# Altium PCB xds100v2.PcbDoc
Units mm, origin at the board's own origin, x right, y up, seen from the top; angles counter-clockwise.
Board outline 36 x 21 mm, 2 copper layers (Top Layer, Bottom Layer), stack 1.571 mm thick; 31 components, 31 nets, 172 pads, 0 vias.
Unrouted connection lines stored in the file: 88.
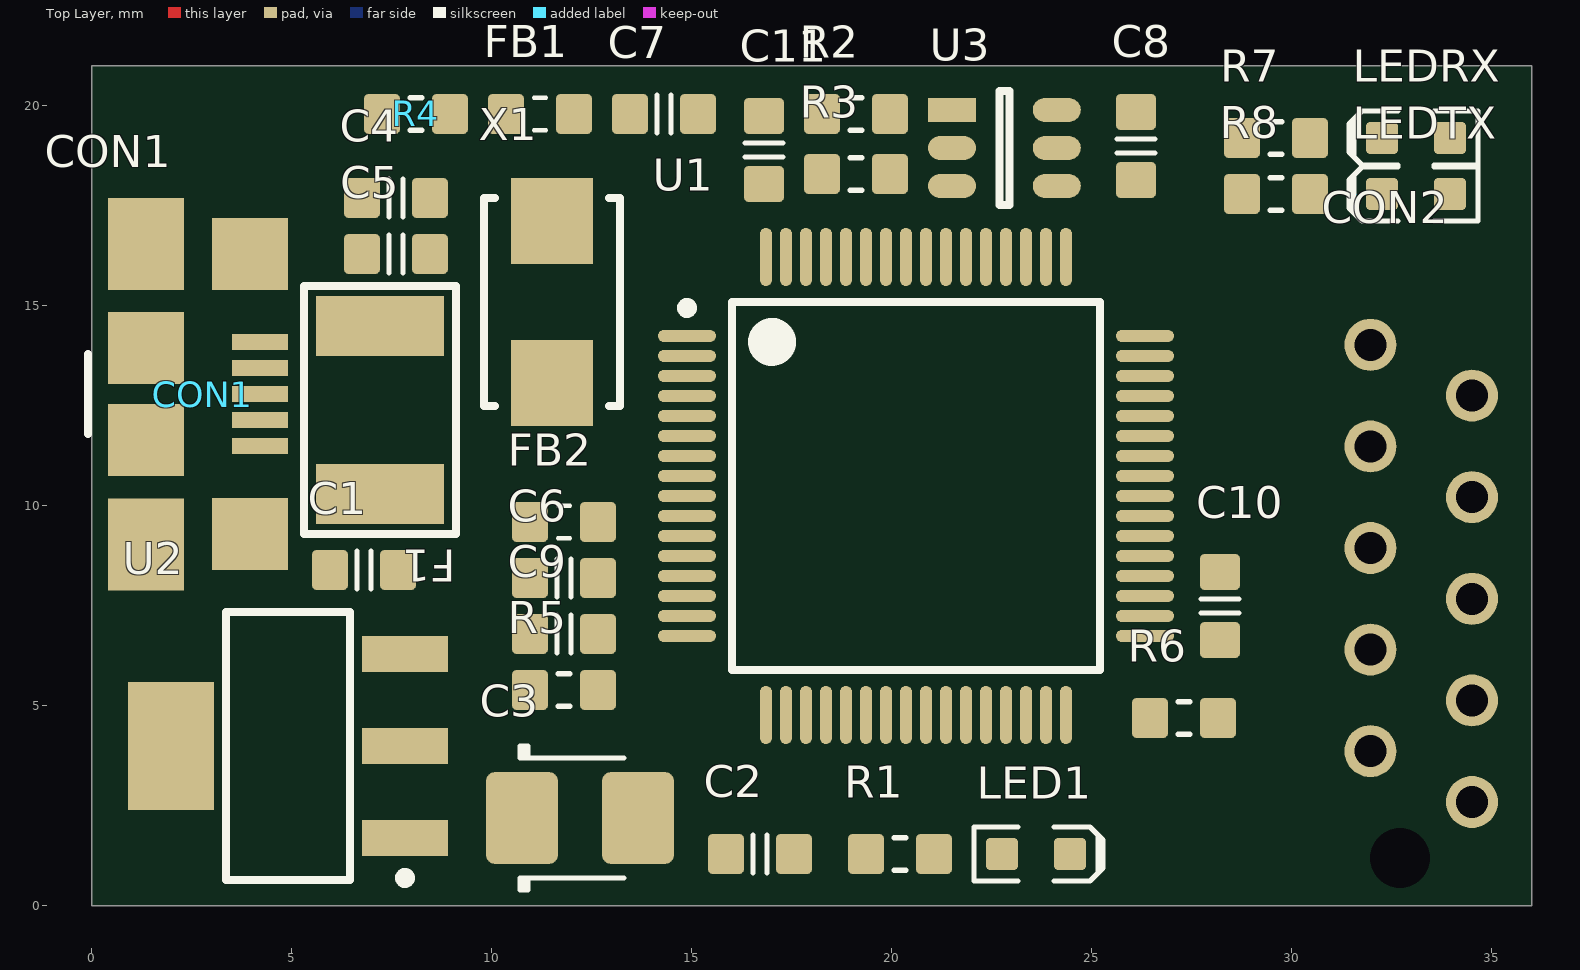
[diagram p0: Top Layer view]
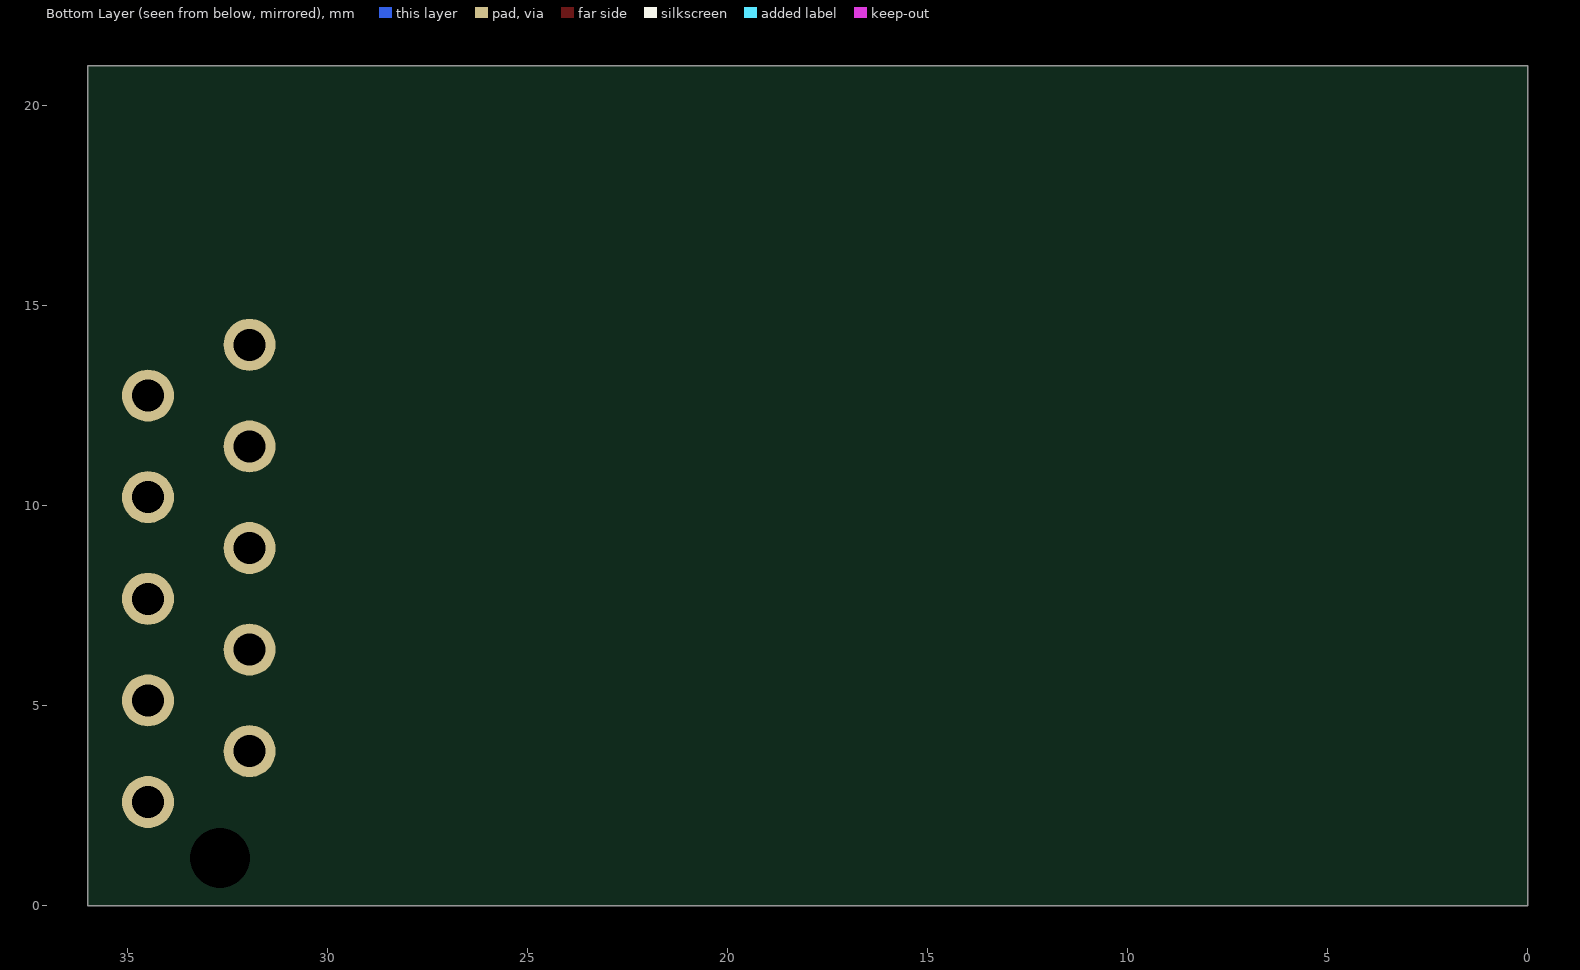
[diagram p1: Bottom Layer view, seen from below]

## Layer stack, top to bottom
Top Solder: solder mask 0.0102, Solder Resist, Dk 3.5
Top Layer: signal copper 0.0356
Dielectric 1: dielectric 1.5, FR-4, Dk 4.8
Bottom Layer: signal copper 0.0356
Bottom Solder: solder mask 0.0102, Solder Resist, Dk 3.5

## Board outline
0,0 36,0 36,21 0,21

## Design rules (kind name [scope] priority, off if disabled: settings)
Clearance [All] p1: gap=0.2
ComponentClearance [All] p1: gap=0.2 collisioncheckmode=3 verticalgap=0.2 showdistances=FALSE
PlaneClearance [All] p1: clearance=0.5
PlaneConnect [All] p1: planeconnectstyle=Relief reliefexpansion=0.508 reliefentries=4 reliefconductorwidth=0.3 reliefairgap=0.2
PolygonConnect [All] p1: connectstyle=Relief reliefconductorwidth=0.3 reliefentries=4 polygonreliefangle="90 Angle" airgapwidth=0.2
RoomDefinition xds100v2 [InComponentClass('xds100v2')] p1: confinementstyle=ConfineIn formatcopy=TRUE lockcomponents=FALSE outline -6.4,-7.8 82,-7.8 82,49 -6.4,49
RoutingVias [All] p1: holewidth=0.9 width=0.5 viastyle="Through Hole" minholewidth=0.3 minwidth=0.7 maxholewidth=4 maxwidth=5
SolderMaskExpansion [All] p1: expansion=0.102
Width [All] p1: maxlimit=10 minlimit=0.2 preferedwidth=0.4 minimp=50.000000 maximp=50.000000 favimp=50.000000
27 further rules are at their usual default settings.

## Components (designator, comment, footprint, x,y, rotation, side; value= is the part's Value field where it differs from the comment)
C1 "1u" CAPC1608X90N 6.8,8.4 r0 top
C2 "100n" CAPC1608X90N 16.7,1.3 r180 top
C3 "100u" CAPMP3528X210N 12.2,2.2 r0 top
C4 "18p" CAPC1608X90N 7.6,17.7 r180 top
C5 "18p" CAPC1608X90N 7.6,16.3 r180 top
C6 "4.7u" CAPC1608X90N 11.8,8.2 r180 top
C7 "4.7u" CAPC1608X90N 14.3,19.8 r180 top
C8 "3.3u" CAPC1608X90N 26.1,19 r90 top
C9 "100n" CAPC1608X90N 11.8,6.8 r0 top
C10 "100n" CAPC1608X90N 28.2,7.5 r90 top
C11 "100n" CAPC1608X90N 16.8,18.9 r270 top
CON1 "USB-B-MICRO" USB-B-MICRO-FCI-10104110 4.2,12.8 r270 top
CON2 "HEADER-10" MICRO-MATCH-10 34.5,2.6 r270 top
F1 "MF-MSMF050-2" PTC-1218 7.2,12.4 r270 top
FB1 "600R" INDC1608N 11.2,19.8 r180 top
FB2 "600R" INDC1608N 11.8,9.6 r180 top
LED1 "Green" LED-0603-GREEN 23.6,1.3 r0 top
LEDRX "Green" LED-0603-GREEN 33.1,19.2 r180 top
LEDTX "Green" LED-0603-GREEN 33.1,17.8 r180 top
R1 "1k" RESC1608X55N 20.2,1.3 r180 top
R2 "10k" RESC1608X55N 19.1,19.8 r180 top
R3 "2.2k" RESC1608X55N 19.1,18.3 r0 top
R4 "12k" RESC1608X55N 8.1,19.8 r180 top
R5 "1k" RESC1608X55N 11.8,5.4 r180 top
R6 "1k" RESC1608X55N 27.3,4.7 r0 top
R7 "1k" RESC1608X55N 29.6,19.2 r0 top
R8 "1k" RESC1608X55N 29.6,17.8 r0 top
U1 "FT2232H" TSQFP50P1200X1200X160-64N 20.6,10.5 r0 top
U2 "TLV1117" SOT223 4.9,4 r180 top
U3 "93AA56" TSOT-23-6 21.5,19.9 r0 top
X1 "12MHz" XTAL-5x3.2 11.5,15.1 r270 top

## Footprints (in the part's own frame and the unit in brackets; to place one, negate y for a bottom-side part, rotate by r counter-clockwise, add the part's x,y. Pads: shape width x height; smd on the part's side, far side on the other; paste and mask are expansions set on the pad)
CAPC1608X90N [mm] "Chip Capacitor, Body 1.6x0.8mm, EIA 0603, IPC Medium Density"
  round 0.254 on Mech15: 0(0,0)
  rrect25% 0.9x1 smd: 1(-0.85,0) 2(0.85,0)
  Top Layer pour cut-out: -0.6,0.5 -0.4,0.7 0.4,0.7 0.6,0.5 0.6,-0.5 0.4,-0.7 -0.4,-0.7 -0.6,-0.5
  silkscreen extent -0.18,-0.48 0.18,0.48, body extent -0.85,-0.45 0.85,0.45, height 0.89
CAPMP3528X210N [mm] "Molded body capacitor, Body 3.5x2.8mm, 1210, IPC Nominal settings"
  round 0.254 on Mech15: 0(0,0)
  rrect25% 1.8x2.3 smd: 1(-1.45,0) 2(1.45,0)
  Top Layer pour cut-out: -0.508,1.27 0.508,1.27 0.508,-1.27 -0.508,-1.27
  silkscreen extent -1.5,-1.8 1.1,1.8, body extent -1.75,-1.4 1.75,1.4, height 2.1
INDC1608N [mm] "Chip bead, Body 1.6x0.8mm, 0603, IPC Medium Density"
  round 0.254 on Mech15: 0(0,0)
  rrect25% 0.9x1 smd: 1(-0.85,0) 2(0.85,0)
  Top Layer pour cut-out: -0.4,0.6 0.4,0.6 0.4,-0.6 -0.4,-0.6
  silkscreen extent -0.15,-0.41 0.15,0.41, body extent -0.8,-0.4 0.8,0.4, height 0.79
LED-0603-GREEN [mm]
  round 0.254 on Mech15: 0(0,0)
  rrect25% 0.8x0.8 smd: A(-0.85,0) K(0.85,0)
  Top Layer pour cut-out: -0.5,0.5 0.5,0.5 0.5,-0.5 -0.5,-0.5
  silkscreen extent -1.55,-0.67 1.68,0.67, body extent -0.8,-0.4 0.8,0.4, height 0.75
MICRO-MATCH-10 [mm]
  round 1.3 hole 0.8: 1(0,0) 2(-1.27,-2.54) 3(-2.54,0) 4(-3.81,-2.54) 5(-5.08,0) 6(-6.35,-2.54) 7(-7.62,0) 8(-8.89,-2.54) 9(-10.16,0) 10(-11.43,-2.54)
  round 0 hole 1.5 unplated: drill(1.4,-1.8)
  body extent -13.03,-3.77 1.6,1.23, height 4
PTC-1218 [mm]
  rect 1.5x3.2 smd: 1(-2.1,0) 2(2.1,0)
  silkscreen extent -3.1,-1.9 3.1,1.9
RESC1608X55N [mm] "Chip Resistor, Body 1.6x0.8mm, EIA 0603, IPC Medium Density"
  round 0.254 on Mech15: 0(0,0)
  rrect25% 0.9x1 smd: 1(-0.85,0) 2(0.85,0)
  Top Layer pour cut-out: -0.6,0.5 -0.4,0.7 0.4,0.7 0.6,0.5 0.6,-0.5 0.4,-0.7 -0.4,-0.7 -0.6,-0.5
  silkscreen extent -0.15,-0.41 0.15,0.41, body extent -0.87,-0.47 0.88,0.48, height 0.54
SOT223 [mm] "SOT223, 4-Leads, Body 6,50x7,00mm (avg), Pitch 2,30mm, IPC Medium Density"
  rect 2.15x0.9 smd: 1(-2.925,2.3) 2(-2.925,0) 3(-2.925,-2.3)
  rect 2.15x3.2 smd: 4(2.925,0)
  silkscreen extent -3.05,-3.35 1.55,3.42, body extent -1.85,-3.35 1.85,3.35, height 1.8
TSOT-23-6 [mm]
  rect 1.2x0.6 smd: 1(0,0)
  oval 1.2x0.6 smd: 2(0,-0.95) 3(0,-1.9) 4(2.62,-1.9) 5(2.62,-0.95) 6(2.62,0)
  silkscreen extent 1.19,-2.38 1.43,0.48, body extent -0.07,-2.4 2.73,0.5, height 1.45
TSQFP50P1200X1200X160-64N [mm] "TSQFP, 64-Leads, Body 10,00x10,00mm, Pitch 0,50mm, IPC Medium Density"
  oval 1.45x0.3 smd: 1(-5.725,3.75) 2(-5.725,3.25) 3(-5.725,2.75) 4(-5.725,2.25) 5(-5.725,1.75) 6(-5.725,1.25) 7(-5.725,0.75) 8(-5.725,0.25) 9(-5.725,-0.25) 10(-5.725,-0.75) 11(-5.725,-1.25) 12(-5.725,-1.75) 13(-5.725,-2.25) 14(-5.725,-2.75) 15(-5.725,-3.25) 16(-5.725,-3.75) 33(5.725,-3.75) 34(5.725,-3.25) 35(5.725,-2.75) 36(5.725,-2.25) 37(5.725,-1.75) 38(5.725,-1.25) 39(5.725,-0.75) 40(5.725,-0.25) 41(5.725,0.25) 42(5.725,0.75) 43(5.725,1.25) 44(5.725,1.75) 45(5.725,2.25) 46(5.725,2.75) 47(5.725,3.25) 48(5.725,3.75)
  oval 0.3x1.45 smd: 17(-3.75,-5.725) 18(-3.25,-5.725) 19(-2.75,-5.725) 20(-2.25,-5.725) 21(-1.75,-5.725) 22(-1.25,-5.725) 23(-0.75,-5.725) 24(-0.25,-5.725) 25(0.25,-5.725) 26(0.75,-5.725) 27(1.25,-5.725) 28(1.75,-5.725) 29(2.25,-5.725) 30(2.75,-5.725) 31(3.25,-5.725) 32(3.75,-5.725) 49(3.75,5.725) 50(3.25,5.725) 51(2.75,5.725) 52(2.25,5.725) 53(1.75,5.725) 54(1.25,5.725) 55(0.75,5.725) 56(0.25,5.725) 57(-0.25,5.725) 58(-0.75,5.725) 59(-1.25,5.725) 60(-1.75,5.725) 61(-2.25,5.725) 62(-2.75,5.725) 63(-3.25,5.725) 64(-3.75,5.725)
  silkscreen extent -5.85,-4.6 4.6,4.6, body extent -6,-6 6,6, height 1.6
USB-B-MICRO-FCI-10104110 [mm]
  rect 0.4x1.4 smd: 1(-1.3,0) 2(-0.65,0) 3(0,0) 4(0.65,0) 5(1.3,0)
  rect 2.3x1.9 smd: SH(-3.75,-2.85) SH(3.758,-2.85)
  rect 1.8x1.9 smd: SH(-3.5,-0.25) SH(-1.15,-2.85) SH(1.15,-2.85) SH(3.5,-0.25)
  silkscreen extent -1,-4.3 1,-4.3, body extent -4.04,-5.55 4.04,0.01, height 2.68
XTAL-5x3.2 [mm] "Molded Inductor, 2-Leads, Body 5,00x3,20mm, IPC Medium Density"
  rect 2.15x2.05 smd: 1(-2.025,0) 2(2.025,0)
  silkscreen extent -2.6,-1.7 2.6,1.7, body extent -2.57,-1.68 2.58,1.68, height 1.35

## Part data
C1 C2 C4 C5 C6 C7 C8 C9 C10 C11: library part CAPC_1u_0603_X7R_16V_10%, "Capacitor SMD Cer 1uF 10% 16V X7R 0603"
C3: library part CAPT_100u_1210_6V3, "Capacitor SMD Tantalum 100uF 20% 6.3V 1210"
FB1 FB2: library part FERRITE_120R-100MHz_0603, "Ferrite bead 120 Ohm at 100 MHz 2A 0603 SMD"
LED1 LEDRX LEDTX: library part LED_SMD_Green_0603_570nm, "LED 0603 SMD Green 570nm 50mcd 20mA"
R1 R2 R3 R4 R5 R6 R7 R8: library part RES_1K_0603_1%, "Resistor SMD chip 1k Ohm 0.1W 1% 0603"
U3: "EEPROM"
X1: library part XTAL_5x3.2

## Nets (pads, with @x,y where several pads share a name; then routed paths per layer and width w, separated by ;. In a path a pad name is that pad's centre, name@x,y a point inside that pad or via, vN(x,y) a via of type N, cw(c..) or ccw(c..) an arc to the next point about the centre after c; other vN are vias at no path point)
1.8V: C8.1 C9.2 C10.2 C11.2 U1.12 U1.37 U1.49 U1.64
3.3V: C2.1 C3.1 CON2.2 FB1.2 FB2.2 LEDRX.A LEDTX.A R1.2 R2.2 R5.2 U1.20 U1.31 U1.42 U1.50 U1.56 U2.2 U2.4 U3.6
5V: C1.2 F1.2 U2.3
D+: CON1.3 U1.8
D-: CON1.2 U1.7
EECLK: U1.62 U3.4
EECS: U1.63 U3.5
EEDATA: R3.1 U1.61 U3.3
GND: C1.1 C2.2 C3.2 C4.2 C5.2 C6.2 C7.1 C8.2 C9.1 C10.1 C11.1 CON1.5 CON1.SH CON2.1 CON2.8 LED1.K R4.2 R6.2 U1.1 U1.5 U1.10 U1.11 U1.13 U1.15 U1.25 U1.35 U1.47 U1.51 U2.1 U3.2
NetC4_1: C4.1 U1.2 X1.1
NetC5_1: C5.1 U1.3 X1.2
NetC6_1: C6.1 FB2.1 U1.9
NetC7_2: C7.2 FB1.1 U1.4
NetCON1_1: CON1.1 F1.1
NetLED1_A: LED1.A R1.1
NetLEDRX_K: LEDRX.K R7.2
NetLEDTX_K: LEDTX.K R8.2
NetR2_1: R2.1 R3.2 U3.1
NetR4_1: R4.1 U1.6
NetR5_1: R5.1 U1.14
NetR6_1: R6.1 U1.32
NetR7_1: R7.1 U1.54
NetR8_1: R8.1 U1.55
NetU1_40: U1.40 U1.41
RX: CON2.9 U1.38
TCK: CON2.7 U1.16
TDI: CON2.4 U1.17
TDO: CON2.5 U1.18
TMS: CON2.6 U1.19
TRST: CON2.3 U1.21
TX: CON2.10 U1.39
pads on no net: C1.0 C2.0 C3.0 C4.0 C5.0 C6.0 C7.0 C8.0 C9.0 C10.0 C11.0 CON1.4 CON2.drill FB1.0 FB2.0 LED1.0 LEDRX.0 LEDTX.0 R1.0 R2.0 R3.0 R4.0 R5.0 R6.0 R7.0 R8.0 U1.22 U1.23 U1.24 U1.26 U1.27 U1.28 U1.29 U1.30 U1.33 U1.34 U1.36 U1.43 U1.44 U1.45 U1.46 U1.48 U1.52 U1.53 U1.57 U1.58 U1.59 U1.60